# Altium PCB Wall_Clock.PcbDoc
Units mm, origin at the board's own origin, x right, y up, seen from the top; angles counter-clockwise.
Board outline 151.89 x 101.6 mm, 2 copper layers (Top Layer, Bottom Layer); 71 components, 72 nets, 332 pads, 32 vias.
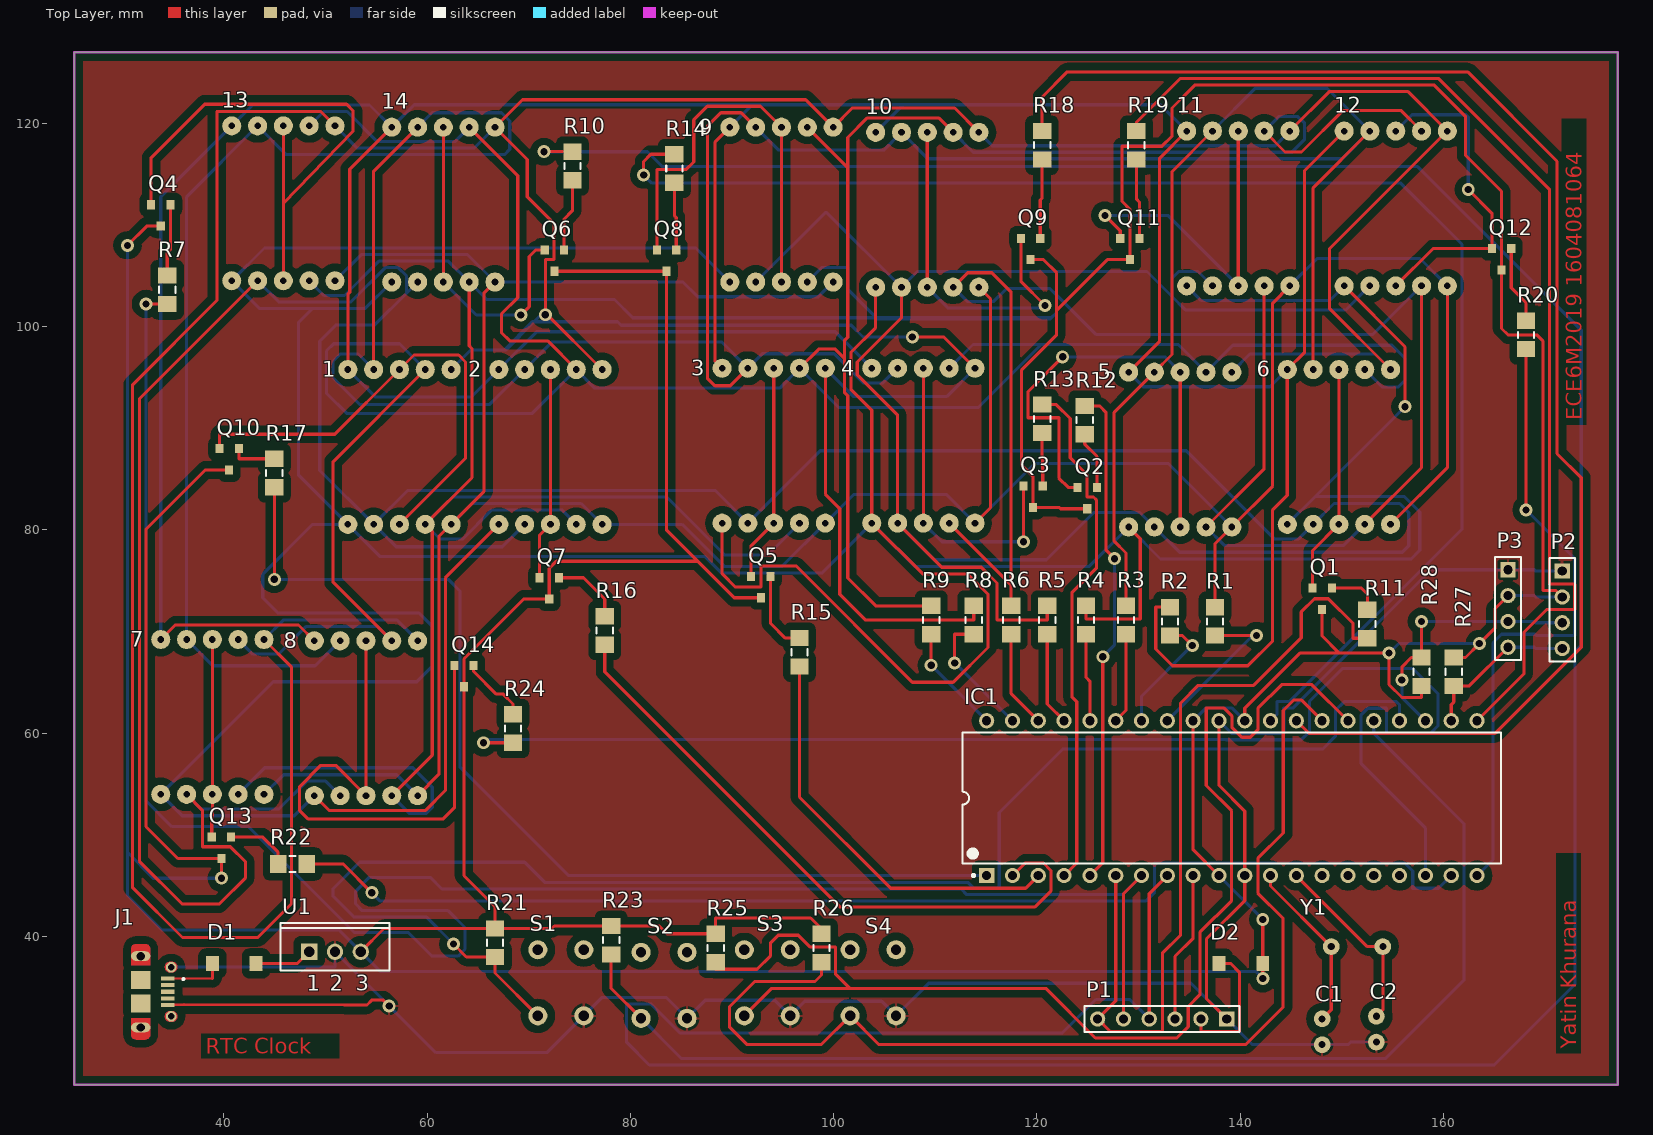
[diagram p0: Top Layer view]
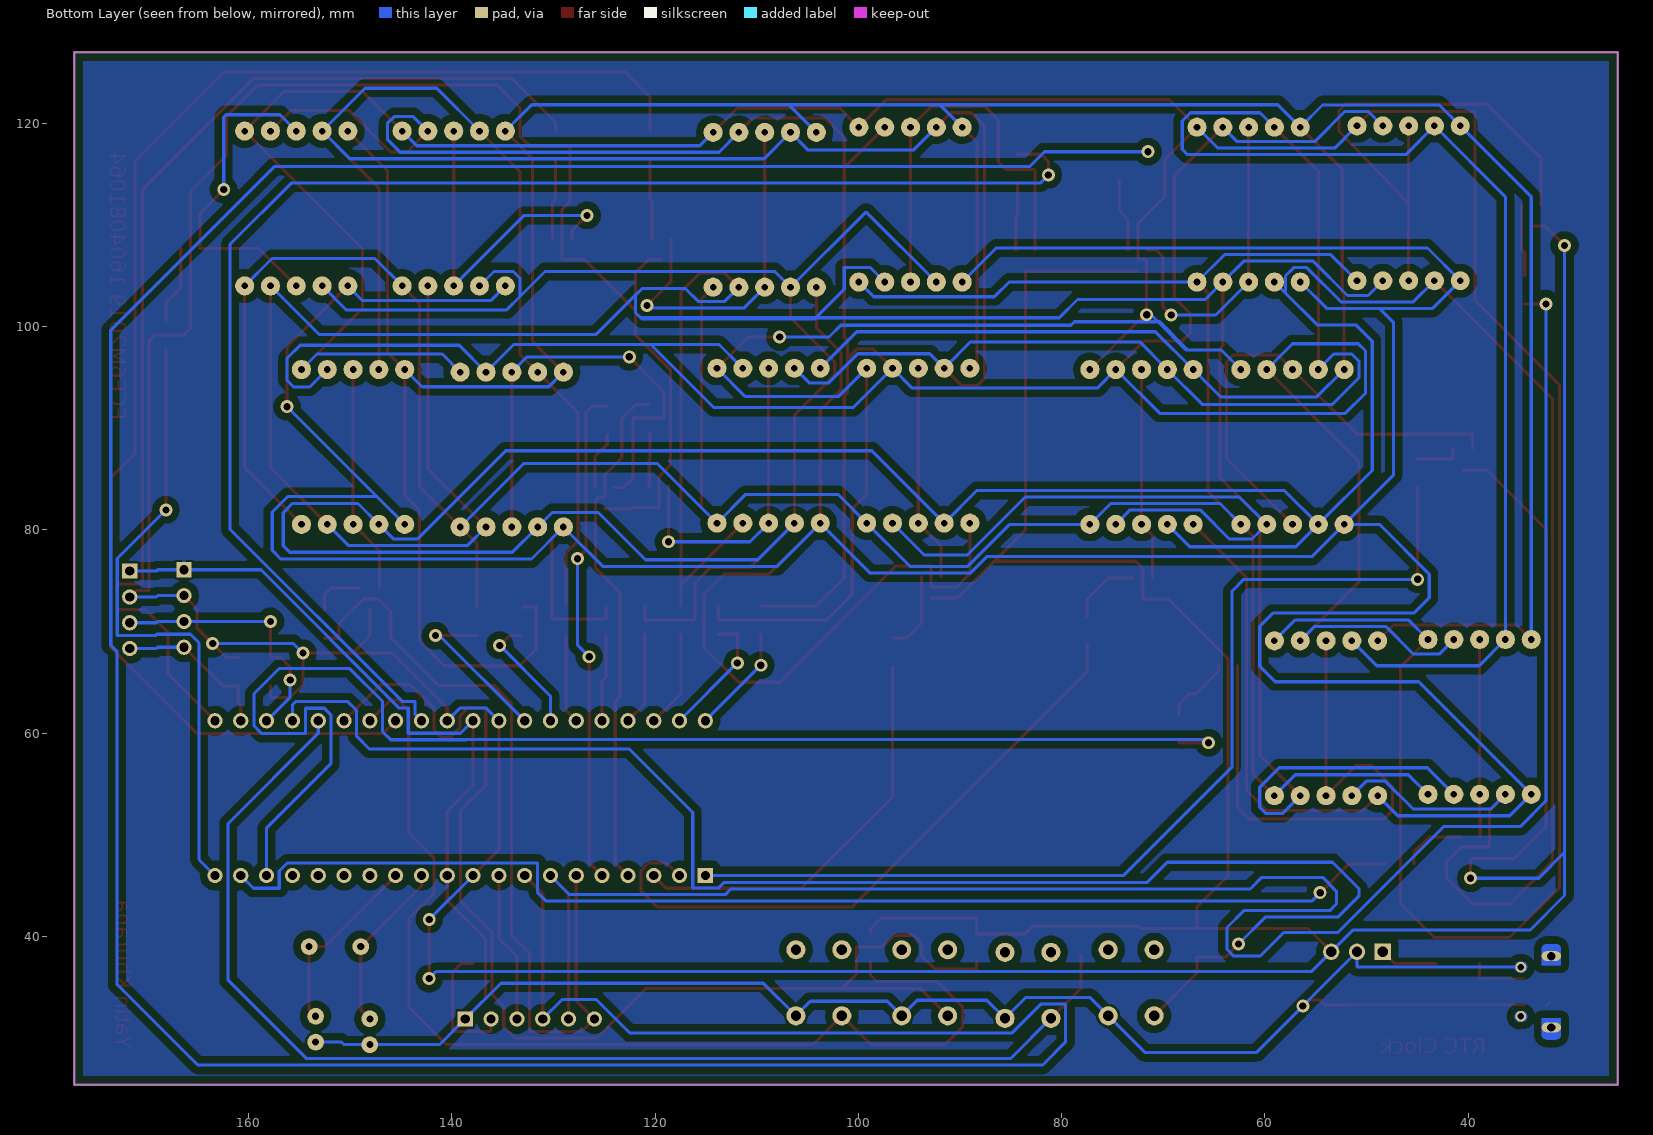
[diagram p1: Bottom Layer view, seen from below]

## Layer stack, top to bottom
Top Solder: solder mask 0.0102, Solder Resist, Dk 3.5
Top Layer: signal copper 0.0356
Dielectric 1: dielectric 0.32, FR-4, Dk 4.8
Bottom Layer: signal copper 0.0356
Bottom Solder: solder mask 0.0102, Solder Resist, Dk 3.5

## Board outline
25.273,25.4 25.273,127 177.165,127 177.165,25.4

## Design rules (kind name [scope] priority, off if disabled: settings)
Clearance [All] p1: gap=0.735 ignorepadtopadclearanceinfootprint=TRUE except(0: Arc-Hole Track-Hole SMDPad-Hole THPad-Hole Via-Hole Fill-Hole Poly-Hole Region-Hole Text-Hole; 0.1: Arc-SMDPad Track-SMDPad SMDPad-THPad; 0.19: Arc-Text Track-Text SMDPad-Text THPad-Text Via-Text Fill-Text Poly-Text Region-Text Text-Text; 0.254: SMDPad-SMDPad SMDPad-Via THPad-THPad THPad-Via Via-Via; 0.33: Arc-Arc Arc-Track Arc-THPad Arc-Via Track-Track Track-THPad Track-Via)
HoleSize [All] p1: absolutevalues=TRUE maxlimit=1.1 minlimit=0.5 maxpercent=80.000 minpercent=20.000
PolygonConnect [All] p1: connectstyle=Relief reliefconductorwidth=0.254 reliefentries=4 polygonreliefangle="90 Angle" airgapwidth=0.254
RoomDefinition Wall_Clock [InComponentClass('Wall_Clock')] p1: confinementstyle=ConfineIn formatcopy=TRUE lockcomponents=FALSE outline 26.67,26.67 176.149,26.67 176.149,126.111 26.67,126.111
RoutingVias [All] p1: holewidth=0.711 width=1.27 viastyle="Through Hole" minholewidth=0.711 minwidth=1.27 maxholewidth=0.711 maxwidth=1.27
SMDEntry [All] p1: side=TRUE corner=TRUE anyangle=FALSE
SMDNeckDown [All] p1: percent=50.000
SMDToCorner [All] p1: distance=10000
SMDToPlane [All] p1: distance=0
SolderMaskExpansion [All] p1: expansion=0.102
Width [All] p1: maxlimit=0.762 minlimit=0.107 preferedwidth=0.108
29 further rules are at their usual default settings.

## Components (designator, comment, footprint, x,y, rotation, side; value= is the part's Value field where it differs from the comment)
1 "7-SEGMENT-DISPLAYPTH" 7-SEGMENT-DISPLAY 57.273,88.16 r0 top
2 "7-SEGMENT-DISPLAYPTH" 7-SEGMENT-DISPLAY 72.132,88.16 r0 top
3 "7-SEGMENT-DISPLAYPTH" 7-SEGMENT-DISPLAY 94.103,88.287 r0 top
4 "7-SEGMENT-DISPLAYPTH" 7-SEGMENT-DISPLAY 108.835,88.287 r0 top
5 "7-SEGMENT-DISPLAYPTH" 7-SEGMENT-DISPLAY 134.108,87.906 r0 top
6 "7-SEGMENT-DISPLAYPTH" 7-SEGMENT-DISPLAY 149.729,88.16 r0 top
7 "7-SEGMENT-DISPLAYPTH" 7-SEGMENT-DISPLAY 38.862,61.592 r0 top
8 "7-SEGMENT-DISPLAYPTH" 7-SEGMENT-DISPLAY 53.975,61.465 r0 top
9 "7-SEGMENT-DISPLAYPTH" 7-SEGMENT-DISPLAY 94.869,112.011 r0 top
10 "7-SEGMENT-DISPLAYPTH" 7-SEGMENT-DISPLAY 109.22,111.503 r0 top
11 "7-SEGMENT-DISPLAYPTH" 7-SEGMENT-DISPLAY 139.827,111.63 r0 top
12 "7-SEGMENT-DISPLAYPTH" 7-SEGMENT-DISPLAY 155.321,111.63 r0 top
13 "7-SEGMENT-DISPLAYPTH" 7-SEGMENT-DISPLAY 45.847,112.138 r0 top
14 "7-SEGMENT-DISPLAYPTH" 7-SEGMENT-DISPLAY 61.595,112.011 r0 top
C1 "22PF-PTH-2.54MM-200V-5%" CAP-PTH-2.54 148.082,30.607 r90 top
C2 "22PF-PTH-2.54MM-200V-5%" CAP-PTH-2.54 153.416,30.861 r90 top
D1 "Schottky diode    A Schottky diode is a semiconductor diode which has a low forward voltage drop and a very fast switching action." SMA-DIODE 41.021,37.335 r0 top
D2 "Schottky diode    A Schottky diode is a semiconductor diode which has a low forward voltage drop and a very fast switching action." SMA-DIODE 140.081,37.335 r180 top
IC1 "MEGA32-P" 40P6 139.192,53.597 r90 top
J1 "SMD+DIP Micro USB; MICRO-B-SMD" HRS_ZX62D-B-5P8 31.877,34.544 r270 top
P1 "Programming Port" HDR1X6 138.684,31.874 r180 top
P2 "I2C" HDR1X4 171.704,75.943 r270 top
P3 "I2C" HDR1X4 166.37,76.07 r270 top
Q1 "NPN transistor    Current controlled devices typically used to amplify current or used as a switch.         BC547 -     COM-08928    (TO-92 45V 100mA) (1.Collector 2.Base 3.Emitter)             2N3904 -     COM-00521    (TO-92 40V 200mA) (1.Emitter 2.Base 3.Collector)             P2N2222A -     COM-12852    (TO-92 40V 600mA) (1.Collector 2.Base 3.Emitter)" SOT23-3 148.082,73.279 r180 top
Q2 "NPN transistor    Current controlled devices typically used to amplify current or used as a switch.         BC547 -     COM-08928    (TO-92 45V 100mA) (1.Collector 2.Base 3.Emitter)             2N3904 -     COM-00521    (TO-92 40V 200mA) (1.Emitter 2.Base 3.Collector)             P2N2222A -     COM-12852    (TO-92 40V 600mA) (1.Collector 2.Base 3.Emitter)" SOT23-3 124.968,83.182 r180 top
Q3 "NPN transistor    Current controlled devices typically used to amplify current or used as a switch.         BC547 -     COM-08928    (TO-92 45V 100mA) (1.Collector 2.Base 3.Emitter)             2N3904 -     COM-00521    (TO-92 40V 200mA) (1.Emitter 2.Base 3.Collector)             P2N2222A -     COM-12852    (TO-92 40V 600mA) (1.Collector 2.Base 3.Emitter)" SOT23-3 119.634,83.309 r180 top
Q4 "NPN transistor    Current controlled devices typically used to amplify current or used as a switch.         BC547 -     COM-08928    (TO-92 45V 100mA) (1.Collector 2.Base 3.Emitter)             2N3904 -     COM-00521    (TO-92 40V 200mA) (1.Emitter 2.Base 3.Collector)             P2N2222A -     COM-12852    (TO-92 40V 600mA) (1.Collector 2.Base 3.Emitter)" SOT23-3 33.782,110.995 r180 top
Q5 "NPN transistor    Current controlled devices typically used to amplify current or used as a switch.         BC547 -     COM-08928    (TO-92 45V 100mA) (1.Collector 2.Base 3.Emitter)             2N3904 -     COM-00521    (TO-92 40V 200mA) (1.Emitter 2.Base 3.Collector)             P2N2222A -     COM-12852    (TO-92 40V 600mA) (1.Collector 2.Base 3.Emitter)" SOT23-3 92.837,74.419 r180 top
Q6 "NPN transistor    Current controlled devices typically used to amplify current or used as a switch.         BC547 -     COM-08928    (TO-92 45V 100mA) (1.Collector 2.Base 3.Emitter)             2N3904 -     COM-00521    (TO-92 40V 200mA) (1.Emitter 2.Base 3.Collector)             P2N2222A -     COM-12852    (TO-92 40V 600mA) (1.Collector 2.Base 3.Emitter)" SOT23-3 72.517,106.55 r180 top
Q7 "NPN transistor    Current controlled devices typically used to amplify current or used as a switch.         BC547 -     COM-08928    (TO-92 45V 100mA) (1.Collector 2.Base 3.Emitter)             2N3904 -     COM-00521    (TO-92 40V 200mA) (1.Emitter 2.Base 3.Collector)             P2N2222A -     COM-12852    (TO-92 40V 600mA) (1.Collector 2.Base 3.Emitter)" SOT23-3 72.009,74.292 r180 top
Q8 "NPN transistor    Current controlled devices typically used to amplify current or used as a switch.         BC547 -     COM-08928    (TO-92 45V 100mA) (1.Collector 2.Base 3.Emitter)             2N3904 -     COM-00521    (TO-92 40V 200mA) (1.Emitter 2.Base 3.Collector)             P2N2222A -     COM-12852    (TO-92 40V 600mA) (1.Collector 2.Base 3.Emitter)" SOT23-3 83.566,106.55 r180 top
Q9 "NPN transistor    Current controlled devices typically used to amplify current or used as a switch.         BC547 -     COM-08928    (TO-92 45V 100mA) (1.Collector 2.Base 3.Emitter)             2N3904 -     COM-00521    (TO-92 40V 200mA) (1.Emitter 2.Base 3.Collector)             P2N2222A -     COM-12852    (TO-92 40V 600mA) (1.Collector 2.Base 3.Emitter)" SOT23-3 119.38,107.693 r180 top
Q10 "NPN transistor    Current controlled devices typically used to amplify current or used as a switch.         BC547 -     COM-08928    (TO-92 45V 100mA) (1.Collector 2.Base 3.Emitter)             2N3904 -     COM-00521    (TO-92 40V 200mA) (1.Emitter 2.Base 3.Collector)             P2N2222A -     COM-12852    (TO-92 40V 600mA) (1.Collector 2.Base 3.Emitter)" SOT23-3 40.513,86.992 r180 top
Q11 "NPN transistor    Current controlled devices typically used to amplify current or used as a switch.         BC547 -     COM-08928    (TO-92 45V 100mA) (1.Collector 2.Base 3.Emitter)             2N3904 -     COM-00521    (TO-92 40V 200mA) (1.Emitter 2.Base 3.Collector)             P2N2222A -     COM-12852    (TO-92 40V 600mA) (1.Collector 2.Base 3.Emitter)" SOT23-3 129.159,107.693 r180 top
Q12 "NPN transistor    Current controlled devices typically used to amplify current or used as a switch.         BC547 -     COM-08928    (TO-92 45V 100mA) (1.Collector 2.Base 3.Emitter)             2N3904 -     COM-00521    (TO-92 40V 200mA) (1.Emitter 2.Base 3.Collector)             P2N2222A -     COM-12852    (TO-92 40V 600mA) (1.Collector 2.Base 3.Emitter)" SOT23-3 165.735,106.677 r180 top
Q13 "NPN transistor    Current controlled devices typically used to amplify current or used as a switch.         BC547 -     COM-08928    (TO-92 45V 100mA) (1.Collector 2.Base 3.Emitter)             2N3904 -     COM-00521    (TO-92 40V 200mA) (1.Emitter 2.Base 3.Collector)             P2N2222A -     COM-12852    (TO-92 40V 600mA) (1.Collector 2.Base 3.Emitter)" SOT23-3 39.751,48.765 r180 top
Q14 "NPN transistor    Current controlled devices typically used to amplify current or used as a switch.         BC547 -     COM-08928    (TO-92 45V 100mA) (1.Collector 2.Base 3.Emitter)             2N3904 -     COM-00521    (TO-92 40V 200mA) (1.Emitter 2.Base 3.Collector)             P2N2222A -     COM-12852    (TO-92 40V 600mA) (1.Collector 2.Base 3.Emitter)" SOT23-3 63.627,65.656 r180 top
R1 "" 8-1206 137.541,70.996 r90 top
R2 "" 8-1206 133.096,70.996 r90 top
R3 "" 8-1206 128.778,71.123 r90 top
R4 "" 8-1206 124.841,71.123 r90 top
R5 "" 8-1206 121.031,71.123 r90 top
R6 "" 8-1206 117.475,71.123 r90 top
R7 "" 8-1206 34.417,103.629 r90 top
R8 "" 8-1206 113.792,71.123 r90 top
R9 "" 8-1206 109.601,71.123 r90 top
R10 "" 8-1206 74.295,115.818 r270 top
R11 "" 8-1206 152.527,70.739 r90 top
R12 "" 8-1206 124.714,90.802 r270 top
R13 "" 8-1206 120.523,90.929 r270 top
R14 "" 8-1206 84.328,115.57 r270 top
R15 "" 8-1206 96.647,67.951 r90 top
R16 "" 8-1206 77.47,70.101 r90 top
R17 "" 8-1206 44.958,85.595 r90 top
R18 "" 8-1206 120.523,117.862 r270 top
R19 "" 8-1206 129.794,117.859 r270 top
R20 "" 8-1206 168.148,99.19 r90 top
R21 "" 8-1206 66.675,39.367 r90 top
R22 "" 8-1206 46.736,47.114 r180 top
R23 "" 8-1206 78.105,39.621 r90 top
R24 "" 8-1206 68.453,60.446 r90 top
R25 "" 8-1206 88.392,38.859 r90 top
R26 "" 8-1206 98.806,38.859 r90 top
R27 "ERJP08J" 8-1206 161.036,66.043 r270 top
R28 "ERJP08J" 8-1206 157.861,66.04 r90 top
S1 "MOMENTARY-SWITCH-SPST-PTH-6.0MM-KIT" TACTILE_SWITCH_PTH_6.0MM_KIT 73.152,35.43 r90 top
S2 "MOMENTARY-SWITCH-SPST-PTH-6.0MM-KIT" TACTILE_SWITCH_PTH_6.0MM_KIT 83.312,35.176 r90 top
S3 "MOMENTARY-SWITCH-SPST-PTH-6.0MM-KIT" TACTILE_SWITCH_PTH_6.0MM_KIT 93.472,35.43 r90 top
S4 "MOMENTARY-SWITCH-SPST-PTH-6.0MM-KIT" TACTILE_SWITCH_PTH_6.0MM_KIT 103.886,35.43 r90 top
U1 "µA7805CKC" KC03 50.927,38.478 r0 top
Y1 "CRYSTAL-16MHZPTH-HC49US" HC49US 151.511,38.989 r180 top

## Footprints (in the part's own frame and the unit in brackets; to place one, negate y for a bottom-side part, rotate by r counter-clockwise, add the part's x,y. Pads: shape width x height; smd on the part's side, far side on the other; paste and mask are expansions set on the pad)
7-SEGMENT-DISPLAY [mil]
  round 74 hole 25.59: 1(-200,-300) 2(-100,-300) 3(0,-300) 4(100,-300) 5(200,-300) 6(200,300) 7(100,300) 8(0,300) 9(-100,300) 10(-200,300)
8-1206 [mm] "Chip Resistor; Body 3.1 x 1.6 mm (LxW typ)"
  rect 1.6x1.8 smd: 1(-1.4,0) 2(1.4,0)
  silkscreen extent -0.3,-0.8 0.3,0.8
40P6 [mm] "DIP, 40-Leads, Row Spacing 15.24mm, Pitch 2.54mm, Body 52.2x13.95mm"
  rect 1.5x1.5 hole 0.9: 1(-7.62,24.13)
  round 1.5 hole 0.9: 2(-7.62,21.59) 3(-7.62,19.05) 4(-7.62,16.51) 5(-7.62,13.97) 6(-7.62,11.43) 7(-7.62,8.89) 8(-7.62,6.35) 9(-7.62,3.81) 10(-7.62,1.27) 11(-7.62,-1.27) 12(-7.62,-3.81) 13(-7.62,-6.35) 14(-7.62,-8.89) 15(-7.62,-11.43) 16(-7.62,-13.97) 17(-7.62,-16.51) 18(-7.62,-19.05) 19(-7.62,-21.59) 20(-7.62,-24.13) 21(7.62,-24.13) 22(7.62,-21.59) 23(7.62,-19.05) 24(7.62,-16.51) 25(7.62,-13.97) 26(7.62,-11.43) 27(7.62,-8.89) 28(7.62,-6.35) 29(7.62,-3.81) 30(7.62,-1.27) 31(7.62,1.27) 32(7.62,3.81) 33(7.62,6.35) 34(7.62,8.89) 35(7.62,11.43) 36(7.62,13.97) 37(7.62,16.51) 38(7.62,19.05) 39(7.62,21.59) 40(7.62,24.13)
  silkscreen extent -7.74,-26.5 6.45,26.5, body extent -7.05,-26.47 7.05,26.47, height 4.83
CAP-PTH-2.54 [mil]
  round 65 hole 27.56: 1(-50,0) 2(50,0)
HC49US [mil]
  round 65 hole 27.56: 1(-100,0) 2(100,0)
HDR1X4 [mm] "Connector; Header; 4 Position"
  rect 1.5x1.5 hole 0.9: 1(0,0)
  round 1.5 hole 0.9: 2(2.54,0) 3(5.08,0) 4(7.62,0)
  silkscreen extent -1.27,-1.27 8.89,1.27
HDR1X6 [mm] "Connector; Header; 6 Position"
  rect 1.5x1.5 hole 0.9: 1(0,0)
  round 1.5 hole 0.9: 2(2.54,0) 3(5.08,0) 4(7.62,0) 5(10.16,0) 6(12.7,0)
  silkscreen extent -1.27,-1.27 13.97,1.27
HRS_ZX62D-B-5P8 [mm]
  rect 0.4x1.35 smd: 1(-1.3,2.6) 2(-0.65,2.6) 3(0,2.6) 4(0.65,2.6) 5(1.3,2.6)
  round 1.05 hole 0.65: S(-2.425,2.925) S_1(2.425,2.925)
  oval 0.95x1.9 hole 0.825: S_2(-3.513,-0.075) S_3(3.513,-0.075)
  rect 1.8x1.9 smd: S_4(-1.15,-0.075) S_5(1.15,-0.075)
  Top Layer region: -2.425,3.35 -2.425,3.55 -2.224,3.51 -2.054,3.396 -1.94,3.226 -1.9,3.025 -1.9,3.025 -1.9,2.825 -1.94,2.624 -2.054,2.454 -2.224,2.34 -2.425,2.3 -2.425,2.3 -2.425,2.5 -2.301,2.525 -2.195,2.595 -2.125,2.701 -2.1,2.825 -2.1,2.825 -2.1,3.025 -2.144,3.187 -2.262,3.306 -2.425,3.35
  Top Layer region: -2.425,2.5 -2.425,2.3 -2.626,2.34 -2.796,2.454 -2.91,2.624 -2.95,2.825 -2.95,2.825 -2.95,3.025 -2.91,3.226 -2.796,3.396 -2.626,3.51 -2.425,3.55 -2.425,3.55 -2.425,3.35 -2.549,3.325 -2.655,3.255 -2.725,3.149 -2.75,3.025 -2.75,3.025 -2.75,2.825 -2.706,2.663 -2.587,2.544 -2.425,2.5
  Top Layer region: 2.425,3.35 2.425,3.55 2.626,3.51 2.796,3.396 2.91,3.226 2.95,3.025 2.95,3.025 2.95,2.825 2.91,2.624 2.796,2.454 2.626,2.34 2.425,2.3 2.425,2.3 2.425,2.5 2.549,2.525 2.655,2.595 2.725,2.701 2.75,2.825 2.75,2.825 2.75,3.025 2.725,3.149 2.655,3.255 2.549,3.325 2.425,3.35
  Top Layer region: 2.425,2.5 2.425,2.3 2.224,2.34 2.054,2.454 1.94,2.624 1.9,2.825 1.9,2.825 1.9,3.025 1.94,3.226 2.054,3.396 2.224,3.51 2.425,3.55 2.425,3.55 2.425,3.35 2.262,3.306 2.144,3.187 2.1,3.025 2.1,3.025 2.1,2.825 2.125,2.701 2.195,2.595 2.301,2.525 2.425,2.5
  Top Layer region: -2.6,0.875 -4.2,0.875 -4.391,0.837 -4.554,0.729 -4.662,0.566 -4.7,0.375 -4.7,0.375 -4.7,-0.075 -3.925,-0.075 -3.925,0.375 -3.902,0.49 -3.837,0.587 -3.74,0.652 -3.625,0.675 -3.625,0.675 -3.4,0.675 -3.285,0.652 -3.188,0.587 -3.123,0.49 -3.1,0.375 -3.1,0.375 -3.1,-0.075 -2.6,-0.075
  Top Layer region: 2.6,-1.025 4.2,-1.025 4.391,-0.987 4.553,-0.879 4.662,-0.716 4.7,-0.525 4.7,-0.525 4.7,-0.075 3.925,-0.075 3.925,-0.525 3.902,-0.64 3.837,-0.737 3.74,-0.802 3.625,-0.825 3.625,-0.825 3.4,-0.825 3.285,-0.802 3.188,-0.737 3.123,-0.64 3.1,-0.525 3.1,-0.525 3.1,-0.075 2.6,-0.075
  Top Layer region: -3.1,-0.075 -2.6,-0.075 -2.6,-1.025 -4.2,-1.025 -4.391,-0.987 -4.553,-0.879 -4.662,-0.716 -4.7,-0.525 -4.7,-0.525 -4.7,-0.075 -3.925,-0.075 -3.925,-0.55 -3.904,-0.655 -3.844,-0.744 -3.755,-0.804 -3.65,-0.825 -3.65,-0.825 -3.4,-0.825 -3.285,-0.802 -3.188,-0.737 -3.123,-0.64 -3.1,-0.525 -3.1,-0.525
  Top Layer region: 3.1,-0.075 2.6,-0.075 2.6,0.875 4.2,0.875 4.391,0.837 4.554,0.729 4.662,0.566 4.7,0.375 4.7,0.375 4.7,-0.075 3.925,-0.075 3.925,0.4 3.904,0.505 3.844,0.594 3.755,0.654 3.65,0.675 3.65,0.675 3.4,0.675 3.285,0.652 3.188,0.587 3.123,0.49 3.1,0.375 3.1,0.375
  Bottom Layer region: -2.425,3.35 -2.425,3.55 -2.224,3.51 -2.054,3.396 -1.94,3.226 -1.9,3.025 -1.9,3.025 -1.9,2.825 -1.94,2.624 -2.054,2.454 -2.224,2.34 -2.425,2.3 -2.425,2.3 -2.425,2.5 -2.301,2.525 -2.195,2.595 -2.125,2.701 -2.1,2.825 -2.1,2.825 -2.1,3.025 -2.144,3.187 -2.262,3.306 -2.425,3.35
  Bottom Layer region: -2.425,2.5 -2.425,2.3 -2.626,2.34 -2.796,2.454 -2.91,2.624 -2.95,2.825 -2.95,2.825 -2.95,3.025 -2.91,3.226 -2.796,3.396 -2.626,3.51 -2.425,3.55 -2.425,3.55 -2.425,3.35 -2.549,3.325 -2.655,3.255 -2.725,3.149 -2.75,3.025 -2.75,3.025 -2.75,2.825 -2.706,2.663 -2.587,2.544 -2.425,2.5
  Bottom Layer region: 2.425,3.35 2.425,3.55 2.626,3.51 2.796,3.396 2.91,3.226 2.95,3.025 2.95,3.025 2.95,2.825 2.91,2.624 2.796,2.454 2.626,2.34 2.425,2.3 2.425,2.3 2.425,2.5 2.549,2.525 2.655,2.595 2.725,2.701 2.75,2.825 2.75,2.825 2.75,3.025 2.725,3.149 2.655,3.255 2.549,3.325 2.425,3.35
  Bottom Layer region: 2.425,2.5 2.425,2.3 2.224,2.34 2.054,2.454 1.94,2.624 1.9,2.825 1.9,2.825 1.9,3.025 1.94,3.226 2.054,3.396 2.224,3.51 2.425,3.55 2.425,3.55 2.425,3.35 2.262,3.306 2.144,3.187 2.1,3.025 2.1,3.025 2.1,2.825 2.125,2.701 2.195,2.595 2.301,2.525 2.425,2.5
  Bottom Layer region: -2.6,0.875 -4.2,0.875 -4.391,0.837 -4.554,0.729 -4.662,0.566 -4.7,0.375 -4.7,0.375 -4.7,-0.075 -3.925,-0.075 -3.925,0.375 -3.902,0.49 -3.837,0.587 -3.74,0.652 -3.625,0.675 -3.625,0.675 -3.4,0.675 -3.285,0.652 -3.188,0.587 -3.123,0.49 -3.1,0.375 -3.1,0.375 -3.1,-0.075 -2.6,-0.075
  Bottom Layer region: 2.6,-1.025 4.2,-1.025 4.391,-0.987 4.553,-0.879 4.662,-0.716 4.7,-0.525 4.7,-0.525 4.7,-0.075 3.925,-0.075 3.925,-0.525 3.902,-0.64 3.837,-0.737 3.74,-0.802 3.625,-0.825 3.625,-0.825 3.4,-0.825 3.285,-0.802 3.188,-0.737 3.123,-0.64 3.1,-0.525 3.1,-0.525 3.1,-0.075 2.6,-0.075
  Bottom Layer region: -3.1,-0.075 -2.6,-0.075 -2.6,-1.025 -4.2,-1.025 -4.391,-0.987 -4.553,-0.879 -4.662,-0.716 -4.7,-0.525 -4.7,-0.525 -4.7,-0.075 -3.925,-0.075 -3.925,-0.55 -3.904,-0.655 -3.844,-0.744 -3.755,-0.804 -3.65,-0.825 -3.65,-0.825 -3.4,-0.825 -3.285,-0.802 -3.188,-0.737 -3.123,-0.64 -3.1,-0.525 -3.1,-0.525
  Bottom Layer region: 3.1,-0.075 2.6,-0.075 2.6,0.875 4.2,0.875 4.391,0.837 4.554,0.729 4.662,0.566 4.7,0.375 4.7,0.375 4.7,-0.075 3.925,-0.075 3.925,0.4 3.904,0.505 3.844,0.594 3.755,0.654 3.65,0.675 3.65,0.675 3.4,0.675 3.285,0.652 3.188,0.587 3.123,0.49 3.1,0.375 3.1,0.375
  Mechanical 10 keep-out region: -3.75,0.875 3.75,0.875 3.75,1.925 -3.75,1.925
  Mechanical 10 keep-out region: -3.75,-1.525 3.75,-1.525 3.75,-1.025 -3.75,-1.025
  Mechanical 10 keep-out region: -2.6,-1.025 -2.05,-1.025 -2.05,0.875 -2.6,0.875
  Mechanical 10 keep-out region: -0.25,-1.025 0.25,-1.025 0.25,0.875 -0.25,0.875
  Mechanical 10 keep-out region: 2.05,-1.025 2.6,-1.025 2.6,0.875 2.05,0.875
  silkscreen extent -1.35,4.04 -1.15,4.24
KC03 [mm] "TO, Thru-Hole, Vertical, Heatsink Mounted; 3 In-Line Leads; Pitch 2.54 mm"
  rect 1.6x1.6 hole 1: 1(-2.54,0)
  round 1.6 hole 1: 2(0,0) 3(2.54,0)
  silkscreen extent -5.35,-1.85 5.35,2.85
SMA-DIODE [mm]
  rect 1.27x1.47 smd: A(-2.15,0) C(2.15,0)
SOT23-3 [mil]
  rect 31.5x35.43 smd: 1(-37.4,-39.37) 2(37.4,-39.37) 3(0,43.31)
TACTILE_SWITCH_PTH_6.0MM_KIT [mil]
  round 74 hole 40: 1(-128,89) 2(128,89) 3(-128,-89) 4(128,-89)

## Part data
D1 D2: library part DIODE-SCHOTTKY-SS14, PROD_ID=DIO-08053
IC1: "MICROCONTROLLER   32 Kbytes FLASH 2 Kbytes SRAM 1 Kbytes EEPROM USART 8-channel 10 bit ADC Source: www.atmel.com .. doc2503.pdf", MPN=ATMEGA32-16PU, OC_FARNELL=1661729, OC_NEWARK=51P1794
J1: library part ZX62D-B-5P8, Package=None, Availability=Unavailable, MF=Hirose, MP=ZX62D-B-5P8, Price=None
P1: library part "Header 6", "Header, 6-Pin", LatestRevisionDate=17-Jul-2002, LatestRevisionNote="Re-released for DXP Platform.", Publisher="Altium Limited"
P2 P3: library part "Header 4", "Header, 4-Pin", LatestRevisionDate=17-Jul-2002, LatestRevisionNote="Re-released for DXP Platform.", Publisher="Altium Limited"
Q1 Q2 Q3 Q4 Q5 Q6 Q7 Q8 Q9 Q10 Q11 Q12 Q13 Q14: library part TRANS_NPN-MMBT2222AL, PROD_ID=TRANS-08049
R1 R2 R3 R4 R5 R6 R7 R8 R9 R10 R11 R12 R13 R14 R15 R16 R17 R18 R19 R20 R21 R22 R23 R24 R25 R26: library part ERJP08J, "Anti-Surge Thick Film Chip Resistor, 10 Ohm to 1M Ohm Range, 5% Tolerance, 1206 Size, 0.25 W", PackageDocument=Mar-2003, Code_IPC="3216 [1206]", ComponentLink1Description="Manufacturer Link", ComponentLink1URL=http://www.panasonic.com/industrial/components/resistive_products.htm, ComponentLink2Description=Datasheet, ComponentLink2URL=http://www.panasonic.com/industrial/components/pdf/AOA0000CE4.pdf, LatestRevisionDate=19-Mar-2004, LatestRevisionNote="Silkscreen size reduced.", Note="If flow soldering, adjust pad width of PCB Footprint to 0.7 - 0.8 times the width of the resistor.", PackageReference=8-1206, Published=17-Dec-2003, Publisher="Altium Limited"
R27 R28: "Anti-Surge Thick Film Chip Resistor, 10 Ohm to 1M Ohm Range, 5% Tolerance, 1206 Size, 0.25 W", PackageDocument=Mar-2003, Code_IPC="3216 [1206]", ComponentLink1Description="Manufacturer Link", ComponentLink1URL=http://www.panasonic.com/industrial/components/resistive_products.htm, ComponentLink2Description=Datasheet, ComponentLink2URL=http://www.panasonic.com/industrial/components/pdf/AOA0000CE4.pdf, LatestRevisionDate=19-Mar-2004, LatestRevisionNote="Silkscreen size reduced.", Note="If flow soldering, adjust pad width of PCB Footprint to 0.7 - 0.8 times the width of the resistor.", PackageReference=8-1206, Published=17-Dec-2003, Publisher="Altium Limited"
U1: "Positive-Voltage Regulator", ComponentLink1Description="Manufacturer Link", ComponentLink1URL=http://www.ti.com/, ComponentLink2Description=Datasheet, ComponentLink2URL=http://www-s.ti.com/sc/ds/ua7805.pdf, DatasheetVersion=Jul-1999, Note="Pin 2 is electrically connected to TAB.", PackageDescription="TO, Thru-Hole, Vertical, Heatsink Mounted; 3 In-Line Leads; Pitch 2.54 mm", PackageReference=KC03, PackageVersion=Sep-1995, Published=15-Apr-2002, Publisher="Altium Limited"
C1 C2: PROD_ID=CAP-09128
S1 S2 S3 S4: PROD_ID=SWCH-08441, SF_SKU=COM-00097
Y1: PROD_ID=XTAL-08181, SF_ID=COM-00536

## Via types
v1: diameter 1.27, hole 0.711, Top Layer to Bottom Layer, 32 vias

## Nets (pads, with @x,y where several pads share a name; then routed paths per layer and width w, separated by ;. In a path a pad name is that pad's centre, name@x,y a point inside that pad or via, vN(x,y) a via of type N, cw(c..) or ccw(c..) an arc to the next point about the centre after c; other vN are vias at no path point)
+5V: D2.A IC1.10 IC1.30 IC1.32 P2.2 P3.2 Q1.3 Q2.3 Q3.3 Q4.3 Q5.3 Q6.3 Q7.3 Q8.3 Q9.3 Q10.3 Q11.3 Q12.3 Q13.3 Q14.3 R21.2 R23.2 R25.2 R26.2 R27.1 R28.1 U1.3 | length 633.9
  Top Layer w0.308: v1(30.505,108.001) 32.399,109.895 Q4.3 ; v1(39.751,45.72) Q13.3 35.469,47.665 32.334,50.8 32.334,80.075 38.151,85.892 Q10.3 ; U1.3 55.756,40.767 R21.2 ; Q6.3 Q8.3 83.566,79.959 86.614,76.911 ; Q5.3 90.206,73.319 86.614,76.911 ; R26.2 98.806,40.743 97.741,41.808 88.392,41.808 R25.2 83.617,40.259 82.855,41.021 R23.2 72.517,41.021 72.263,40.767 R21.2 ; Q9.3 120.65,106.593 121.945,105.297 121.945,101.6 ; Q2.3 122.352,82.082 122.225,82.209 Q3.3 119.634,85.242 118.501,86.375 118.501,95.743 121.945,99.187 121.945,101.6 ; IC1.32 135.382,48.517 IC1.10 ; IC1.30 140.462,62.455 145.883,67.876 149.764,67.876 ; v1(142.231,41.668) D2.A 142.231,35.848 v1(142.24,35.839) ; Q1.3 148.082,69.558 149.764,67.876 ; R28.1 157.861,63.5 155.935,63.5 154.665,64.77 v1(154.665,67.876) 149.764,67.876 ; R27.1 162.185,67.443 v1(163.551,68.809) 165.1,70.358 165.1,72.26 P3.2 ; P2.2 171.072,74.035 169.832,74.035 169.832,98.554 169.199,99.187 166.37,99.187 165.735,99.822 Q12.3 165.735,113.309 162.204,116.84 162.204,120.669 159.08,123.794 135.579,123.794 133.299,121.514 133.299,118.745 132.309,117.754 128.397,117.754 128.397,112.319 129.159,111.557 Q11.3 126.938,106.593 121.945,101.6 ; R21.2 66.675,42.926 63.627,45.974 Q14.3 63.627,67.31 69.509,73.192 Q7.3 72.009,76.2 72.72,76.911 86.614,76.911
  Bottom Layer w0.308: v1(30.505,108.001) 30.505,48.26 ; v1(39.751,45.72) 33.045,45.72 30.505,48.26 ; IC1.32 136.624,62.459 139.22,62.459 IC1.30 ; IC1.10 v1(142.231,41.668) ; v1(142.24,35.839) 141.529,36.551 55.394,36.551 U1.3 51.33,40.615 33.909,40.615 30.505,44.018 30.505,48.26 ; v1(154.665,67.876) 155.597,68.809 v1(163.551,68.809) ; P3.2 168.961,73.53 169.088,73.403 P2.2
GND: C1.1 C2.1 IC1.11 IC1.31 J1.5 J1.S P1.1 P2.1 P3.1 S1.3 S2.3 S3.3 S4.3 U1.2 | length 231.3
  Top Layer w0.254: J1.5 36.068,33.274
  Top Layer w0.308: 36.068,33.274 51.822,33.244 54.072,33.244 54.546,33.718 55.689,33.718 v1(56.261,33.147) ; IC1.31 137.922,54.864 140.462,52.324 IC1.11 140.462,43.51 136.703,39.751 136.703,33.855 P1.1
  Bottom Layer w0.308: J1.S 34.816,36.982 50.927,36.982 U1.2 60.855,28.55 71.783,28.55 S1.3 77.221,33.987 83.511,33.987 S2.3 87.354,33.706 94.206,33.706 S3.3 97.158,33.604 104.721,33.604 S4.3 109.35,35.382 135.176,35.382 P1.1 141.221,29.337 C1.1 150.622,29.337 150.876,29.591 C2.1 ; IC1.31 139.156,59.983 144.297,59.983 144.297,62.459 145.186,62.459 158.798,76.07 P3.1 168.961,76.07 169.088,75.943 P2.1
Net1_1: 1.1 2.1 3.1 4.1 5.1 6.1 7.1 8.1 9.1 10.1 11.1 12.1 13.1 14.1 R4.2 | length 497
  Top Layer w0.308: 8.1 50.34,52.4 59.842,52.4 61.793,54.351 61.793,75.281 2.1 ; 3.1 89.023,75.696 90.348,74.371 92.837,74.371 92.837,76.454 96.291,76.454 107.747,64.999 111.76,64.999 115.189,68.428 115.189,73.66 113.182,75.667 108.756,75.667 4.1 103.755,91.783 101.693,93.845 101.693,97.453 104.14,99.9 10.1 ; R4.2 124.841,71.222 130.175,71.222 130.175,79.14 5.1 ; 12.1 156.235,98.016 v1(156.235,92.126)
  Bottom Layer w0.308: 8.1 46.917,51.867 35.887,51.867 7.1 44.859,65.049 58.979,65.049 60.503,66.573 60.503,70.51 59.207,71.806 45.339,71.806 43.815,73.33 43.815,75.641 48.714,80.54 1.1 ; 14.1 53.921,101.797 48.729,101.797 ; 9.1 86.433,107.747 43.996,107.747 13.1 43.488,101.797 48.729,101.797 ; 11.1 136.192,102.565 148.796,102.565 12.1 ; 6.1 147.396,83.287 ; v1(156.235,92.126) 147.396,83.287 ; 48.729,101.797 47.32,100.389 47.32,85.413 1.1 ; 1.1 55.365,77.368 87.363,77.368 88.988,75.743 98.831,75.743 4.1 108.045,76.378 125.12,76.378 5.1 132.175,77.14 156.845,77.14 157.683,77.978 157.683,81.763 156.159,83.287 147.396,83.287
Net1_2: 1.2 2.2 3.2 4.2 5.2 6.2 7.2 8.2 9.2 10.2 11.2 12.2 13.2 14.2 R5.2 | length 469.7
  Top Layer w0.308: 7.2 37.871,52.423 37.871,48.819 40.635,48.819 42.139,47.315 42.139,45.771 39.548,43.18 35.89,43.18 31.674,47.396 31.674,92.885 13.2 ; 10.2 106.68,100.869 102.331,96.52 102.331,95.25 106.295,91.286 4.2 110.636,76.327 114.529,76.327 116.078,74.778 116.078,71.12 121.031,71.12 R5.2
  Bottom Layer w0.308: 7.2 37.767,52.527 45.39,52.527 48.132,55.269 50.011,55.269 8.2 ; 13.2 45.39,102.435 52.5,102.435 55.88,105.815 57.15,105.815 57.963,105.002 57.963,103.299 ; 14.2 57.963,103.299 ; 2.2 67.386,78.334 56.94,78.334 1.2 ; 9.2 99.165,111.227 99.336,111.227 10.2 108.231,105.434 130.837,105.434 133.299,102.972 ; 4.2 109.899,77.064 120.955,77.064 125.603,81.712 130.143,81.712 5.2 134.054,77.8 155.971,77.8 156.606,78.435 156.606,81.697 155.702,82.601 149.25,82.601 6.2 145.765,79.116 143.383,79.116 134.717,87.782 98.678,87.782 3.2 88.352,83.878 58.072,83.878 1.2 ; 11.2 135.863,105.434 133.958,105.434 133.299,104.775 133.299,102.972 ; 12.2 150.422,101.651 134.62,101.651 133.299,102.972 ; 1.2 49.428,85.845 49.428,98.562 51.046,100.18 54.844,100.18 57.963,103.299
Net1_3: 1.3 1.8 Q10.2 | length 47.8
  Top Layer w0.308: Q10.2 39.563,89.408 50.901,89.408 1.8 58.699,97.206 63.092,97.206 63.777,96.52 63.777,87.044 1.3
Net1_4: 1.4 2.4 3.4 4.4 5.4 6.4 7.4 8.4 9.4 10.4 11.4 12.4 13.4 14.4 R6.2 | length 415.9
  Top Layer w0.308: 8.4 60.503,57.833 60.503,79.851 1.4 64.415,85.142 64.415,97.842 64.135,98.123 14.4 ; 4.4 117.475,74.568 ; 10.4 113.185,105.308 115.57,105.308 117.475,103.403 117.475,74.568 ; R6.2 117.475,74.568 ; 5.4 142.367,86.005 11.4 ; 6.4 157.861,86.132 12.4
  Bottom Layer w0.308: 7.4 44.021,56.591 58.598,56.591 60.503,54.686 60.503,52.705 59.868,52.07 58.29,52.07 8.4 ; 13.4 49.832,103.073 51.865,103.073 55.245,106.453 62.073,106.453 14.4 65.859,102.667 78.435,102.667 80.229,100.873 104.207,100.873 ; 2.4 73.248,81.964 66.369,81.964 63.5,79.096 61.258,79.096 1.4 62.513,83.24 83.587,83.24 89.306,77.521 93.497,77.521 3.4 ; 9.4 98.834,105.816 101.397,105.816 101.397,103.683 104.207,100.873 ; 10.4 113.184,102.459 115.722,102.459 117.023,103.759 121.285,103.759 121.945,103.099 ; 5.4 138.456,78.478 150.207,78.478 6.4 ; 12.4 153.089,99.238 125.806,99.238 121.945,103.099 ; 104.207,100.873 104.343,100.736 121.285,100.736 121.422,100.873 ; 104.207,100.873 121.422,100.873 ; 121.422,100.873 121.945,101.397 121.945,103.099
Net1_5: 1.5 2.5 3.5 4.5 5.5 6.5 7.5 8.5 9.5 10.5 11.5 12.5 13.5 14.5 R1.2 | length 314.8
  Top Layer w0.308: 8.5 61.155,55.945 61.155,79.342 1.5 65.583,83.77 65.583,103.299 14.5 ; 4.5 115.443,82.195 115.443,102.74 10.5 ; R1.2 137.541,78.639 5.5 143.205,84.303 143.205,102.308 11.5 ; 6.5 160.401,86.132 12.5
  Bottom Layer w0.308: 7.5 45.877,55.907 56.993,55.907 8.5 ; 13.5 53.5,107.091 63.975,107.091 14.5 85.169,104.391 86.614,102.946 98.504,102.946 9.5 ; 1.5 64.415,82.602 75.15,82.602 2.5 85.093,80.54 89.226,76.408 94.924,76.408 3.5 102.006,83.49 111.093,83.49 4.5 119.786,86.538 132.937,86.538 5.5 ; 11.5 147.602,106.705 157.706,106.705 12.5
Net1_6: 1.6 2.6 3.6 4.6 5.6 6.6 7.6 8.6 9.6 10.6 11.6 12.6 13.6 14.6 R8.2 | length 473.6
  Top Layer w0.308: 7.6 46.634,66.52 46.634,43.18 43.332,39.878 35.916,39.878 31.013,44.78 31.013,94.285 39.319,102.591 39.319,121.158 39.345,121.183 49.502,121.183 13.6 ; v1(71.628,101.168) 71.628,106.604 71.633,106.604 ; 2.6 71.633,101.36 71.633,106.604 ; 3.6 99.183,83.519 100.609,82.093 100.609,73.66 103.149,71.12 113.792,71.12 R8.2 ; v1(107.747,98.984) 110.839,98.984 4.6 ; 10.6 111.909,121.514 101.832,121.514 9.6 97.247,122.332 69.377,122.332 14.6 69.85,116.456 69.85,112.776 72.466,110.16 72.466,106.604 71.633,106.604 ; 11.6 148.813,123.155 156.495,123.155 12.6 148.793,107.642 148.793,101.796 6.6
  Bottom Layer w0.308: 7.6 45.877,71.147 56.993,71.147 8.6 ; 13.6 53.116,117.569 64.613,117.569 14.6 ; 1.6 64.261,97.688 67.564,97.688 ; v1(71.628,101.168) 71.196,101.168 70.51,100.482 ; 3.6 101.974,93.116 111.124,93.116 4.6 ; v1(107.747,98.984) 102.895,98.984 101.737,100.142 79.07,100.142 78.73,100.482 70.51,100.482 ; 10.6 115.618,117.805 143.462,117.805 11.6 ; 5.6 140.969,97.307 153.282,97.307 6.6 ; 67.564,97.688 67.716,97.688 70.51,100.482 ; 67.564,97.688 70.358,100.482 70.51,100.482
Net1_7: 1.7 2.7 3.7 4.7 5.7 6.7 7.7 8.7 9.7 10.7 11.7 12.7 13.7 14.7 R9.2 | length 387
  Top Layer w0.308: 8.7 50.749,74.851 50.749,86.716 1.7 ; 14.7 68.91,114.856 68.91,102.856 67.31,101.256 67.31,99.404 68.111,98.603 71.85,98.603 2.7 ; 3.7 98.526,97.79 100.161,97.79 101.055,96.896 ; 9.7 101.397,115.643 ; R9.2 104.14,72.523 101.397,75.266 101.397,93.207 101.055,93.549 101.055,96.896 ; 10.7 110.335,120.548 103.327,120.548 101.397,118.618 101.397,115.643 ; 11.7 144.421,117.196 146.05,117.196 150.139,121.285 155.826,121.285 12.7 ; 101.055,96.896 101.055,98.607 101.397,98.949 101.397,115.643
  Bottom Layer w0.308: 7.7 42.847,67.767 45.364,67.767 48.106,70.509 55.091,70.509 8.7 ; 13.7 49.811,121.182 52.118,121.182 55.093,118.207 62.711,118.207 14.7 ; 1.7 57.27,98.323 50.8,98.323 50.089,97.612 50.089,93.447 52.07,91.465 70.357,91.465 2.7 76.498,93.955 94.691,93.955 3.7 100.501,92.05 114.249,92.05 120.443,98.244 ; 4.7 113.712,98.244 120.443,98.244 ; 10.7 113.716,117.167 145.082,117.167 146.355,118.44 146.355,120.015 145.694,120.675 143.792,120.675 11.7 ; 6.7 153.993,94.056 155.575,94.056 156.235,94.717 156.235,96.876 154.94,98.171 139.293,98.171 5.7 133.931,98.244 120.443,98.244
Net1_9: 1.9 2.9 3.9 4.9 5.9 6.9 7.9 8.9 9.9 10.9 11.9 12.9 13.9 14.9 R3.2 | length 400.5
  Top Layer w0.308: 1.9 54.733,115.309 14.9 ; 3.9 89.839,94.183 88.316,94.183 87.579,94.92 87.579,119.736 88.9,121.056 90.904,121.056 9.9 ; R3.2 128.778,77.719 127.604,78.892 127.604,91.562 5.9 133.299,97.257 133.299,115.262 11.9 ; 6.9 147.189,113.658 12.9
  Bottom Layer w0.308: 8.9 48.974,66.624 38.91,66.624 7.9 36.322,112.773 13.9 46.134,116.931 67.604,116.931 68.123,117.45 68.123,120.244 67.31,121.056 60.48,121.056 14.9 ; 1.9 53.206,97.307 51.435,97.307 50.749,96.622 50.749,94.945 53.34,92.354 66.166,92.354 2.9 72.313,98.501 88.969,98.501 3.9 92.989,97.333 100.051,97.333 102.921,94.463 104.851,94.463 4.9 ; 9.9 94.587,117.373 104.93,117.373 10.9 109.274,116.529 150.06,116.529 12.9 148.562,123.469 141.506,123.469 11.9
Net1_10: 1.10 2.10 3.10 4.10 5.10 6.10 7.10 8.10 9.10 10.10 11.10 12.10 13.10 14.10 R2.2 | length 396.4
  Top Layer w0.308: 7.10 35.207,70.637 47.343,70.637 8.10 ; 1.10 52.193,103.2 52.375,103.382 52.375,115.491 14.10 ; 3.10 88.341,96.589 88.341,118.183 9.10 ; 5.10 132.08,98.578 132.08,116.583 11.10 ; R2.2 131.699,72.396 131.699,68.275 133.35,66.624 140.767,66.624 143.205,69.063 143.205,81.966 144.649,83.41 6.10 146.355,97.486 146.355,115.364 12.10
  Bottom Layer w0.308: 7.10 33.782,112.773 13.10 42.829,121.82 54.326,121.82 14.10 58.728,121.844 92.002,121.844 ; 1.10 54.883,93.091 64.363,93.091 2.10 70.776,99.504 100.159,99.504 4.10 ; 9.10 92.002,121.844 ; 10.10 106.861,121.844 ; 5.10 130.473,94.082 142.951,94.082 6.10 ; 11.10 132.153,121.844 106.861,121.844 ; 92.002,121.844 106.861,121.844
Net2_3: 2.3 2.8 Q7.2 | length 20.9
  Top Layer w0.308: Q7.2 71.059,79.467 2.3 2.8
Net3_3: 3.3 3.8 Q5.2 | length 21.4
  Top Layer w0.308: Q5.2 91.887,78.451 3.3 3.8
Net4_3: 4.3 4.8 Q3.2 | length 31.3
  Top Layer w0.308: 4.3 4.8 ; v1(118.684,78.831) Q3.2
  Bottom Layer w0.308: 4.3 110.671,78.831 v1(118.684,78.831)
Net5_3: 5.3 5.8 Q2.2 | length 46
  Top Layer w0.308: v1(122.543,97.028) 119.139,93.624 119.139,91.034 122.174,91.034 122.174,85.09 123.082,84.182 Q2.2 ; 5.3 5.8
  Bottom Layer w0.308: v1(122.543,97.028) 132.607,97.028 5.8
Net6_3: 6.3 6.8 Q1.2 | length 22.6
  Top Layer w0.308: Q1.2 147.132,77.943 6.3 6.8
Net7_3: 7.3 7.8 Q13.2 | length 19.5
  Top Layer w0.308: Q13.2 38.801,51.816 38.862,51.877 7.3 7.8
Net8_3: 8.3 8.8 Q14.2 | length 56.3
  Top Layer w0.308: 8.8 8.3 51,56.82 49.53,56.82 47.447,54.737 47.447,52.375 48.26,51.562 61.595,51.562 62.677,52.644 Q14.2
Net9_3: 9.3 9.8 Q8.2 | length 41.3
  Top Layer w0.308: Q8.2 82.616,115.484 85.512,115.484 86.233,116.205 86.233,120.348 87.579,121.694 92.805,121.694 9.8 9.3
Net10_3: 10.3 10.8 Q9.2 | length 35.4
  Top Layer w0.308: 10.3 10.8 ; Q9.2 118.43,104.455 v1(120.802,102.083)
  Bottom Layer w0.308: 10.3 111.282,101.821 120.541,101.821 v1(120.802,102.083)
Net11_3: 11.3 11.8 Q11.2 | length 34.1
  Top Layer w0.308: v1(126.695,110.947) 128.209,109.433 Q11.2 ; 11.3 11.8
  Bottom Layer w0.308: v1(126.695,110.947) 132.89,110.947 11.3
Net12_3: 12.3 12.8 Q12.2 | length 32.8
  Top Layer w0.308: 12.3 158.988,107.677 Q12.2 164.785,111.178 v1(162.458,113.505)
  Bottom Layer w0.308: 12.8 156.924,120.853 162.23,120.853 162.458,120.625 v1(162.458,113.505)
Net13_3: 13.3 13.8 Q4.2 | length 54.1
  Top Layer w0.308: Q4.2 32.832,116.627 38.1,121.895 52.07,121.895 52.705,121.26 52.705,119.228 45.847,112.116 ; 13.3 45.847,112.116 ; 13.8 45.847,112.116
Net14_3: 14.3 14.8 Q6.2 | length 32.1
  Top Layer w0.308: 14.3 14.8 ; v1(69.215,101.143) 70.043,101.971 70.043,106.908 70.684,107.55 Q6.2
  Bottom Layer w0.308: 14.3 64.843,101.143 v1(69.215,101.143)
NetC1_2: C1.2 IC1.12 Y1.2 | length 16.9
  Top Layer w0.308: IC1.12 143.002,44.958 Y1.2 148.971,32.766 C1.2
NetC2_2: C2.2 IC1.13 Y1.1 | length 18.5
  Top Layer w0.308: IC1.13 152.53,38.989 Y1.1 154.051,32.766 C2.2
NetD1_A: D1.A J1.1 | length 5.9
  Top Layer w0.2: J1.1 38.85,35.844
  Top Layer w0.308: 38.85,35.844 38.871,35.865 D1.A
NetD1_C: D1.C U1.1 | length 5.7
  Top Layer w0.308: D1.C 47.244,37.335 U1.1
NetD2_C: D2.C P1.2 | length 13.2
  Top Layer w0.308: P1.2 136.144,30.632 139.929,30.632 139.929,36.471 139.065,37.335 D2.C
NetIC1_1: IC1.1 R17.1 | length 101.4
  Top Layer w0.308: v1(44.958,75.133) R17.1
  Bottom Layer w0.308: v1(44.958,75.133) 62.078,75.133 63.221,73.99 63.221,56.693 73.936,45.977 IC1.1
NetIC1_2: IC1.2 R16.1 | length 63.4
  Top Layer w0.308: R16.1 77.47,66.04 100.609,42.901 119.837,42.901 121.387,44.45 121.387,46.482 120.65,47.219 118.844,47.219 IC1.2
NetIC1_3: IC1.3 R15.1 | length 40.6
  Top Layer w0.308: R15.1 96.647,53.696 105.613,44.729 118.894,44.729 IC1.3
NetIC1_4: IC1.4 R13.1 | length 51.5
  Top Layer w0.308: R13.1 121.92,92.329 123.292,90.957 123.292,87.082 124.943,85.431 124.943,83.236 125.578,83.236 125.857,82.956 125.857,76.225 123.444,73.812 123.444,63.576 123.927,63.094 123.927,47.222 IC1.4
NetIC1_5: IC1.5 R12.1 | length 49.3
  Top Layer w0.308: R12.1 126.162,92.202 126.822,91.541 126.822,77.978 v1(127.635,77.165) ; IC1.5 126.492,47.247 v1(126.492,67.513)
  Bottom Layer w0.308: v1(126.492,67.513) 127.635,68.656 v1(127.635,77.165)
NetIC1_6: IC1.6 P1.6 R11.1 | length 81.4
  Top Layer w0.308: IC1.6 127.762,33.652 P1.6 127.226,30.632 132.359,30.632 132.359,38.329 134.137,40.107 134.137,62.941 135.89,64.694 141.341,64.694 146.025,69.377 146.025,71.933 147.32,73.228 148.692,73.228 151.13,70.79 151.13,69.339 R11.1
NetIC1_7: IC1.7 P1.5 R7.1 | length 198.3
  Top Layer w0.308: v1(32.334,102.229) R7.1 ; P1.5 128.524,44.199 IC1.7
  Bottom Layer w0.308: v1(32.334,102.229) 32.334,53.34 34.874,50.8 42.411,50.8 52.85,40.361 58.163,40.361 60.474,38.049 63.043,38.049 63.729,38.735 63.729,40.869 62.066,42.531 53.608,42.531 52.959,43.18 52.959,44.45 54.305,45.796 60.3,45.796 61.443,44.653 112.557,44.653 113.106,44.105 128.43,44.105 IC1.7
NetIC1_8: IC1.8 P1.4 R10.1 | length 347.7
  Top Layer w0.108: 73.366,117.221 73.37,117.218 R10.1
  Top Layer w0.308: v1(71.501,117.221) 73.366,117.221 ; P1.4 131.064,44.199 IC1.8
  Bottom Layer w0.308: v1@71.549,117.218 81.69,117.218 83.16,115.748 157.48,115.748 173.576,99.652 173.576,68.641 172.949,68.013 172.949,35.255 165.024,27.33 81.863,27.33 79.627,29.566 79.627,33.349 82.018,33.349 84.866,30.501 122.525,30.501 125.806,33.782 129.156,33.782 P1.4
NetIC1_9: IC1.9 P1.3 | length 14.8
  Top Layer w0.308: P1.3 133.604,38.024 135.382,39.802 IC1.9
NetIC1_18: IC1.18 R24.1 | length 135.6
  Top Layer w0.308: v1(65.532,59.046) R24.1
  Bottom Layer w0.308: v1(65.532,59.046) 65.269,59.309 65.218,59.309 65.218,59.36 65.532,59.36 138.605,59.345 146.035,59.345 146.837,60.147 146.837,63.119 150.065,66.346 157.021,66.346 159.487,63.881 159.487,60.706 158.75,59.969 154.396,59.969 154.396,62.451 152.57,62.451 151.917,61.798 151.917,56.998 158.242,50.673 IC1.18
NetIC1_19: IC1.19 R22.1 | length 119.9
  Top Layer w0.308: R22.1 51.74,47.114 v1(54.556,44.298)
  Bottom Layer w0.308: v1(54.556,44.298) 55.394,43.459 130.708,43.459 131.597,44.348 131.597,47.219 156.21,47.219 156.997,46.431 156.997,44.729 159.534,44.729 IC1.19
NetIC1_20: IC1.20 R20.1 | length 62.1
  Top Layer w0.308: v1(168.148,81.967) R20.1
  Bottom Layer w0.308: IC1.20 164.897,47.552 164.897,68.885 165.735,69.723 169.037,69.723 169.139,69.621 172.938,69.621 172.938,77.177 v1(168.148,81.967)
NetIC1_21: IC1.21 R19.1 | length 108.1
  Top Layer w0.308: R19.1 129.794,120.091 134.134,124.432 159.515,124.432 170.47,113.477 170.47,74.676 172.899,74.676 172.938,74.637 172.938,72.169 170.18,72.169 167.945,69.933 167.945,65.84 IC1.21
NetIC1_22: IC1.22 P2.4 P3.4 R27.2 | length 15.8
  Top Layer w0.308: IC1.22 160.782,62.789 161.036,63.043 R27.2 162.563,64.643 P3.4
  Bottom Layer w0.308: P3.4 168.961,68.45 169.088,68.323 P2.4
NetIC1_23: IC1.23 P2.3 P3.3 R28.2 | length 26
  Top Layer w0.308: v1(155.922,65.227) 155.922,66.497 156.864,67.44 R28.2 v1(157.861,70.99)
  Bottom Layer w0.308: v1(155.922,65.227) 155.922,63.537 IC1.23 ; v1(157.861,70.99) P3.3 168.961,70.99 169.088,70.863 P2.3
NetIC1_24: IC1.24 R21.1 S1.1 | length 148.9
  Top Layer w0.308: v1(62.586,39.243) 63.862,37.967 R21.1 66.675,36.395 S1.1
  Bottom Layer w0.308: v1(62.586,39.243) 59.944,41.885 52.807,41.885 50.749,43.942 50.749,44.704 53.34,47.295 69.596,47.295 71.577,45.314 113.208,45.314 113.779,44.743 116.296,44.743 116.296,52.187 122.53,58.42 148.107,58.42 149.377,59.69 149.377,62.23 150.241,63.094 155.372,63.094 155.702,62.763 IC1.24
NetIC1_25: IC1.25 R23.1 S2.1 | length 122.5
  Top Layer w0.308: R23.1 78.105,34.871 S2.1
  Bottom Layer w0.308: S2.1 84.985,27.991 154.356,27.991 162.027,35.662 162.027,51.105 153.162,59.969 IC1.25
NetIC1_26: IC1.26 R25.1 S3.1 | length 121.9
  Top Layer w0.308: R25.1 88.392,36.754 92.456,36.754 93.802,38.1 93.802,39.37 94.537,40.105 96.52,40.105 97.662,38.964 100.201,38.964 100.201,36.273 101.6,34.874 ; S3.1 93.907,34.874 101.6,34.874 ; IC1.26 147.069,64.77 144.094,64.77 141.757,62.433 141.757,60.325 141.021,59.588 140.183,59.588 139.192,60.579 139.192,61.697 138.43,62.459 136.677,62.459 136.677,54.839 139.167,52.349 139.167,43.51 136.042,40.386 136.042,34.239 134.899,33.096 134.899,31.115 133.779,29.994 125.758,29.994 120.879,34.874 101.6,34.874
NetIC1_27: IC1.27 R26.1 S4.1 | length 109
  Top Layer w0.308: R26.1 98.806,36.195 98.171,35.56 92.227,35.56 89.764,33.096 89.764,31.039 91.44,29.362 98.809,29.362 S4.1 104.448,29.356 140.558,29.356 144.221,33.02 144.221,41.783 141.757,44.247 141.757,47.676 144.247,50.165 144.247,62.23 145.257,63.24 146.059,63.24 IC1.27
NetIC1_28: IC1.28 R18.1 | length 139.6
  Top Layer w0.308: R18.1 120.523,122.606 122.987,125.07 162.392,125.07 171.196,116.265 171.196,87.506 173.576,85.126 173.576,68.446 165.1,59.969 146.79,59.969 IC1.28
NetIC1_29: IC1.29 R14.1 | length 143.4
  Top Layer w0.308: v1(81.305,114.935) 81.305,116.256 82.02,116.97 R14.1
  Bottom Layer w0.308: v1(81.305,114.935) 82.118,114.122 155.822,114.122 161.849,108.095 161.849,80.064 144.908,63.123 143.636,63.123 143.636,61.851 IC1.29
NetIC1_33: IC1.33 R1.1 | length 16.3
  Top Layer w0.308: R1.1 v1(141.63,69.596)
  Bottom Layer w0.308: IC1.33 141.221,69.596 v1(141.63,69.596)
NetIC1_34: IC1.34 R2.1 | length 12.1
  Top Layer w0.308: R2.1 134.341,69.596 v1(135.306,68.631)
  Bottom Layer w0.308: IC1.34 130.302,63.627 v1(135.306,68.631)
NetIC1_35: IC1.35 R3.1 | length 8.9
  Top Layer w0.308: IC1.35 128.778,62.233 R3.1
NetIC1_36: IC1.36 R4.1 | length 8.7
  Top Layer w0.308: R4.1 124.841,65.481 125.222,65.1 IC1.36
NetIC1_37: IC1.37 R5.1 | length 9.2
  Top Layer w0.308: R5.1 121.031,62.868 IC1.37
NetIC1_38: IC1.38 R6.1 | length 9.6
  Top Layer w0.308: R6.1 117.475,63.884 IC1.38
NetIC1_39: IC1.39 R8.1 | length 12.7
  Top Layer w0.308: v1(111.912,66.907) 111.912,69.723 R8.1
  Bottom Layer w0.308: v1(111.912,66.907) IC1.39
NetIC1_40: IC1.40 R9.1 | length 10.8
  Top Layer w0.308: v1(109.601,66.678) R9.1
  Bottom Layer w0.308: v1(109.601,66.678) IC1.40
NetQ1_1: Q1.1 R11.2 | length 5.3
  Top Layer w0.308: Q1.1 151.933,74.279 152.527,73.685 R11.2
NetQ2_1: Q2.1 R12.2 | length 5.7
  Top Layer w0.308: R12.2 124.714,88.443 125.918,87.239 Q2.1
NetQ3_1: Q3.1 R13.2 | length 5.2
  Top Layer w0.308: R13.2 120.523,86.929 120.584,86.868 Q3.1
NetQ4_1: Q4.1 R7.2 | length 7.1
  Top Layer w0.308: R7.2 34.417,107.264 34.732,107.579 Q4.1
NetQ5_1: Q5.1 R15.2 | length 8.1
  Top Layer w0.308: Q5.1 93.787,70.814 95.25,69.351 R15.2
NetQ6_1: Q6.1 R10.2 | length 7.2
  Top Layer w0.308: Q6.1 73.467,110.566 74.295,111.394 R10.2
NetQ7_1: Q7.1 R16.2 | length 7.1
  Top Layer w0.308: Q7.1 75.381,75.292 77.47,73.203 R16.2
NetQ8_1: Q8.1 R14.2 | length 6.7
  Top Layer w0.308: R14.2 84.328,110.932 84.516,110.744 Q8.1
NetQ9_1: Q9.1 R18.2 | length 7.8
  Top Layer w0.308: Q9.1 120.33,112.471 120.523,112.664 R18.2
NetQ10_1: Q10.1 R17.2 | length 4.5
  Top Layer w0.308: Q10.1 41.463,86.995 R17.2
NetQ11_1: Q11.1 R19.2 | length 7.9
  Top Layer w0.308: R19.2 129.794,112.573 130.109,112.258 Q11.1
NetQ12_1: Q12.1 R20.2 | length 7.7
  Top Layer w0.308: Q12.1 166.685,103.825 168.148,102.362 R20.2
NetQ13_1: Q13.1 R22.2 | length 6.4
  Top Layer w0.308: Q13.1 43.831,49.765 45.336,48.26 R22.2
NetQ14_1: Q14.1 R24.2 | length 6.8
  Top Layer w0.308: Q14.1 64.577,66.065 66.812,63.83 67.488,63.83 68.453,62.865 R24.2
pads on no net: IC1.14 IC1.15 IC1.16 IC1.17 J1.2 J1.3 J1.4 J1.S_1 J1.S_2 J1.S_3 J1.S_4 J1.S_5 S1.2 S1.4 S2.2 S2.4 S3.2 S3.4 S4.2 S4.4
copper on no net: | length 0.4
  Top Layer w0.254: 32.004,33.528 32.288,33.244

## Polygon pours and split planes (outlines as drawn)
GND on Top Layer "Top Layer-No Net" (solid, pour order 6): 25.273,127 25.273,25.4 177.165,25.4 177.165,127
GND on Bottom Layer "Top Layer-No Net" (solid, pour order 8): 25.273,127 25.273,25.4 177.165,25.4 176.911,25.654 176.911,127

## Keep-outs
Keep-Out Layer:
  lines w0.254: 25.273,25.4 177.165,25.4 177.165,125.73 177.165,127 25.273,127 25.273,25.4

## Other copper
Top Layer:
  text "ECE6M2019 1604081064" at 173.609,90.805 h1.52 r90
  text "Yatin Khurana" at 173.101,28.956 h1.52 r90
  text "RTC Clock" at 38.227,28.448 h1.52

## Text inside footprints (layer, text, board x,y; h text height)
U1: Top Overlay "3" at 52.967,34.653 h1.5; Top Overlay "1" at 48.137,34.653 h1.5; Top Overlay "2" at 50.427,34.653 h1.5